# EAGLE board led_analog_watch_mvmt_v1_3 (EAGLE 6.2)
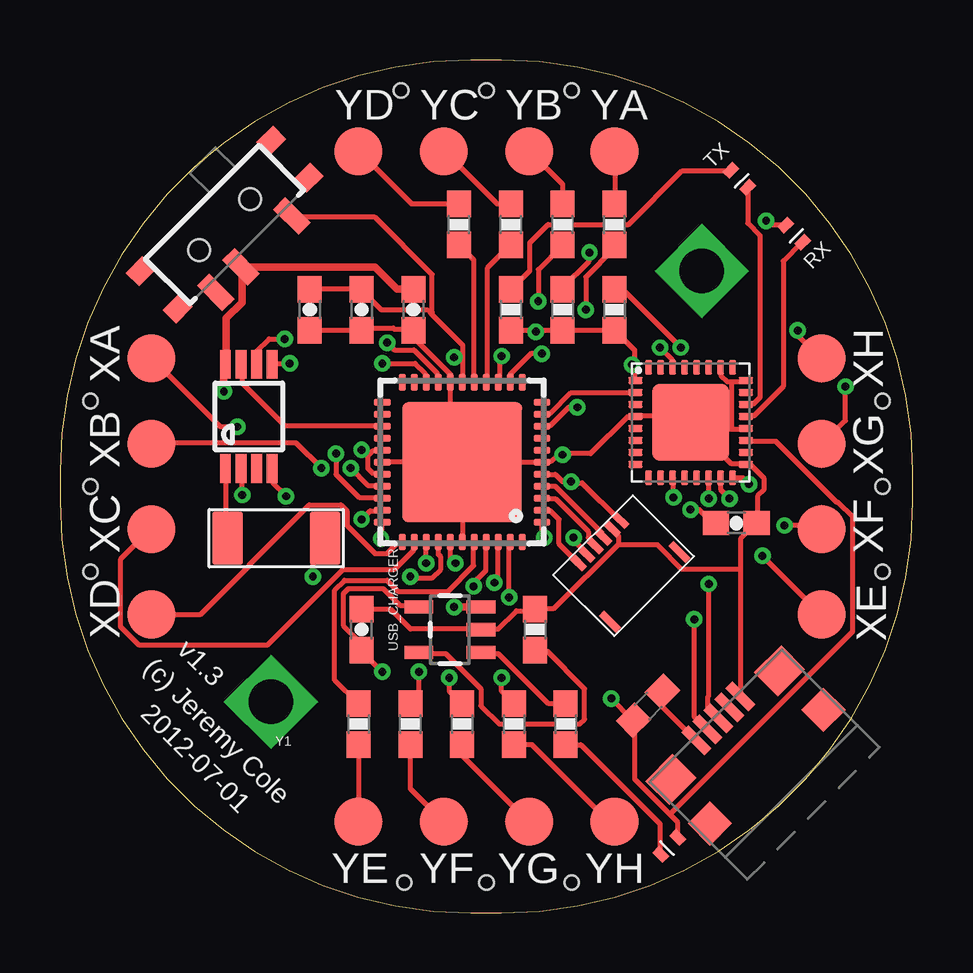
[diagram p0: board, top side]
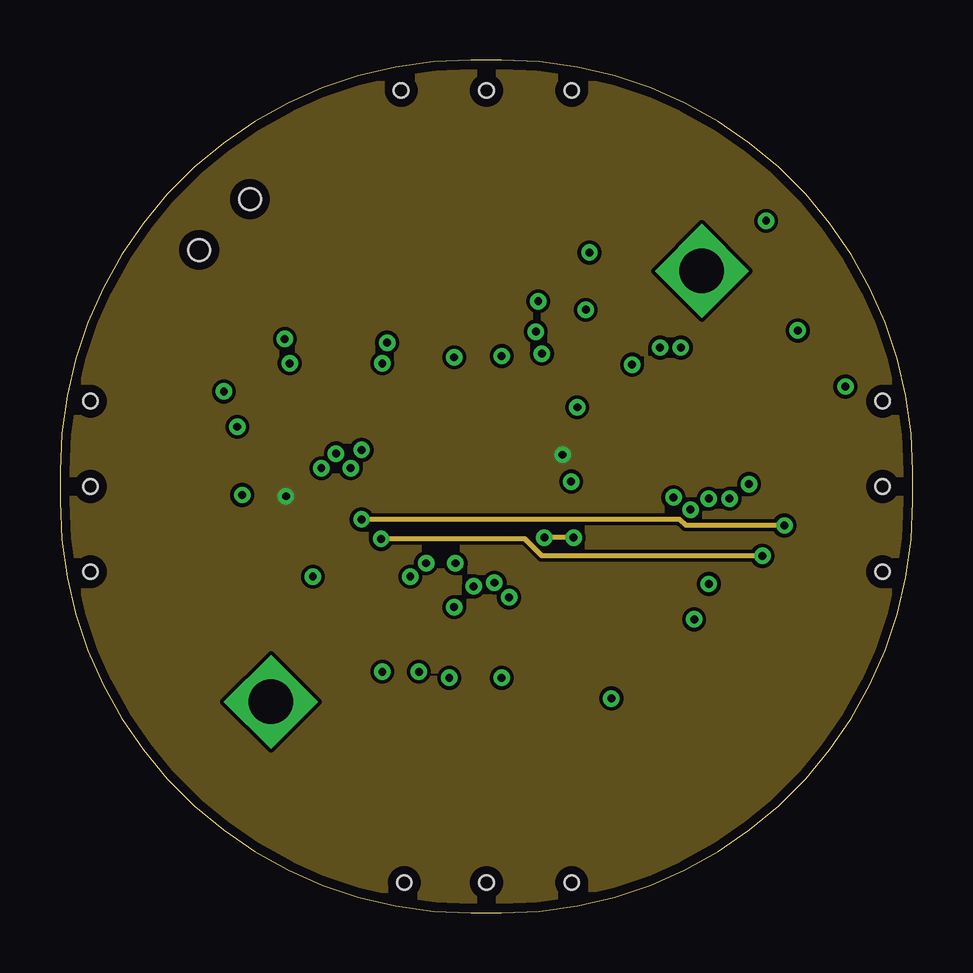
[diagram p1: board, inner layer GND]
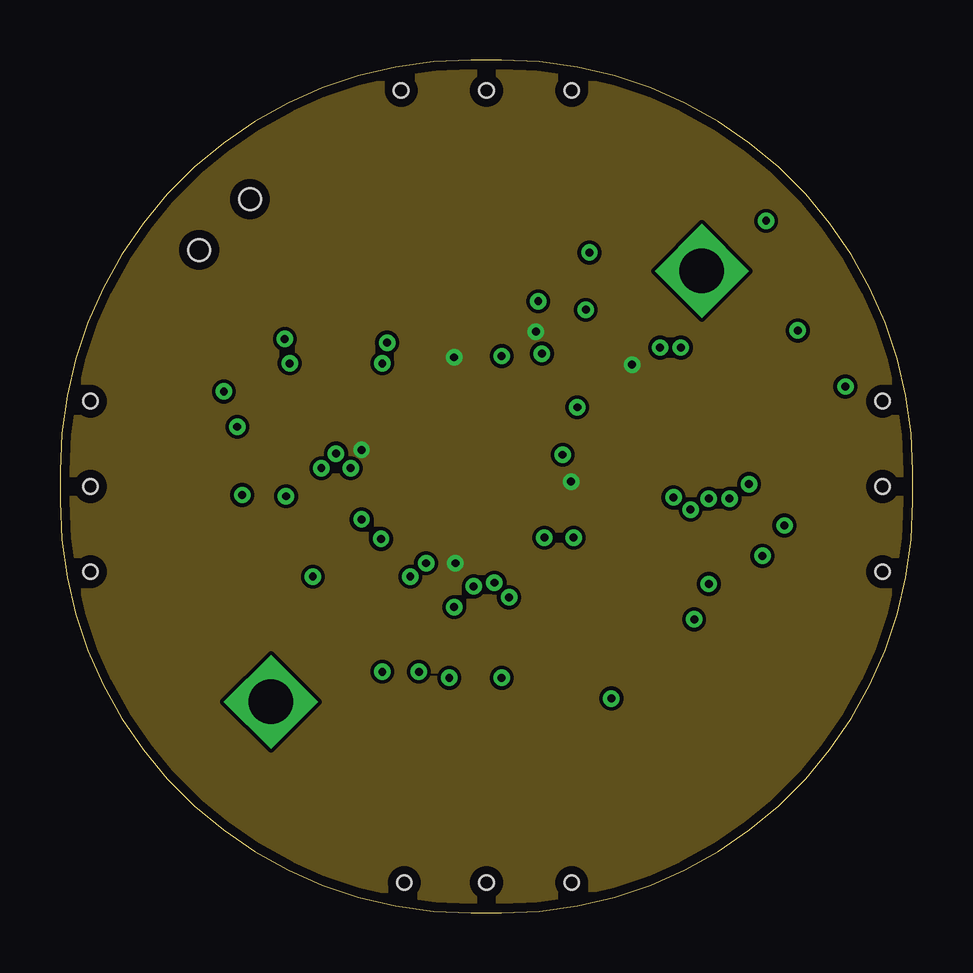
[diagram p2: board, inner layer VCC]
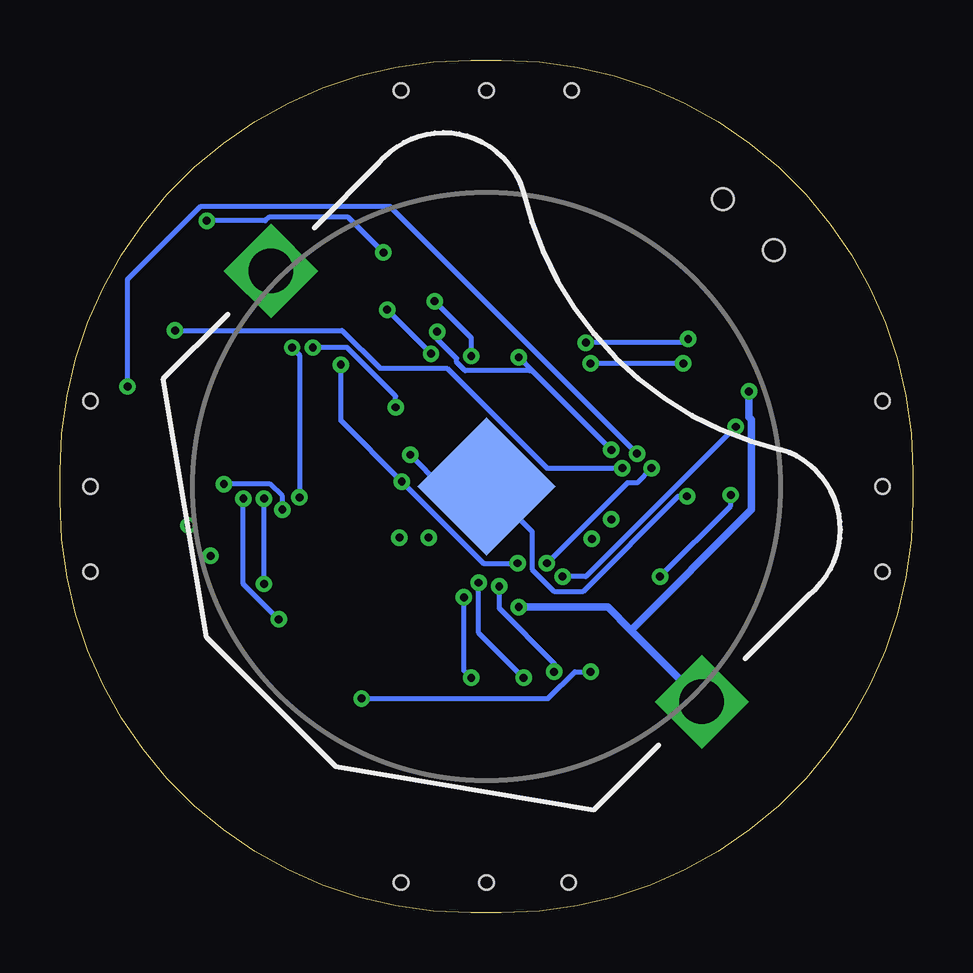
[diagram p3: board, bottom side, seen from below]

Size 35.56 x 35.56 mm. Coordinates in mm from the lower left corner, seen from the top.
Outline: 18.42,0 arc90 35.56,17.14 35.56,18.41 arc90 18.42,35.56 17.14,35.56 arc90 0,18.41 0,17.14 arc90 17.14,0 18.42,0
Copper layers (1*2+15*16): Top 0.0356mm / dielectric 1.5011mm / GND 0.0356mm / dielectric 0.1499mm / VCC 0.0356mm / dielectric 0.2007mm / Bottom 0.0356mm
Design rules: minimum track width 6mil, minimum drill 13mil, track to track 6mil, track to pad 6mil, pad to pad 6mil, via to via 6mil, smd to smd 6mil, copper to edge 15mil, drill to drill 6mil, minimum pad ring 7mil, minimum via ring 7mil, stop-mask expansion 4mil, vias tented up to drill 25mil, thermal gap 10mil
Net classes: 0 signal: width 0.203 mm; 1 supply: width 0.305 mm
Holes 0.6 mm at 17.78,1.27 34.29,17.78 1.27,17.78 17.78,34.29 34.29,14.22 34.29,21.34 21.34,1.27 14.35,1.27 1.27,14.22 1.27,21.34 14.22,34.29 21.34,34.29
tKeepout: area 1.3,11.2 to 2.7,24.1; area 33,11.3 to 34.4,24.3; area 11.3,33 to 24.3,34.4; area 11.3,1.1 to 24.3,2.5
tRestrict: area 3.6,25.8 to 9.9,32
vRestrict: area 7.7,14.5 to 10.3,16.8

## Footprints (pad centres in the part's own frame; a part is rotated, then mirrored left to right if it is on the bottom)
BATTCON_245MM_PTH = drill 1.854 square: 1 -12.7,0; 3 12.7,0 | smd 4.064 x 4.064: 2 0,0
0603-CAP = smd 1.1 x 1: 1 -0.85,0; 2 0.85,0
0402 = smd 0.6 x 0.4: 1 0,-0.5; 2 0,0.5
0603 = smd 1.1 x 1: 1 -0.85,0; 2 0.85,0
MLF44-TH = smd 0.7 x 0.3: 1 -3.325,2.5; 2 -3.325,2; 3 -3.325,1.5; 4 -3.325,1; 5 -3.325,0.5; 6 -3.325,0; 7 -3.325,-0.5; 8 -3.325,-1; 9 -3.325,-1.5; 10 -3.325,-2; 11 -3.325,-2.5; 23 3.325,-2.5; 24 3.325,-2; 25 3.325,-1.5; 26 3.325,-1; 27 3.325,-0.5; 28 3.325,0; 29 3.325,0.5; 30 3.325,1; 31 3.325,1.5; 32 3.325,2; 33 3.325,2.5 | smd 0.3 x 0.7: 12 -2.5,-3.325; 13 -2,-3.325; 14 -1.5,-3.325; 15 -1,-3.325; 16 -0.5,-3.325; 17 0,-3.325; 18 0.5,-3.325; 19 1,-3.325; 20 1.5,-3.325; 21 2,-3.325; 22 2.5,-3.325; 34 2.5,3.325; 35 2,3.325; 36 1.5,3.325; 37 1,3.325; 38 0.5,3.325; 39 0,3.325; 40 -0.5,3.325; 41 -1,3.325; 42 -1.5,3.325; 43 -2,3.325; 44 -2.5,3.325 | smd 5 x 5: TH 0,0
UMAX8 = smd 0.45 x 1.2: 1 -0.975,-2.175; 2 -0.325,-2.175; 3 0.325,-2.175; 4 0.975,-2.175; 5 0.975,2.175; 6 0.325,2.175; 7 -0.325,2.175; 8 -0.975,2.175
SWITCH-MA12R = smd 0.711 x 1.499: 1 -2.261,-1.74; 2 -0.762,-1.74; 3 2.235,-1.74 | smd 0.991 x 0.787: 4 3.848,-1.092; 5 -3.848,-1.092; 6 -3.848,1.092; 7 3.848,1.092 | hole 0.9: -1.499,0; 1.499,0
MOLEX_503480 = smd 0.3 x 0.7: 1 -1.25,1.4; 2 -0.75,1.4; 3 -0.25,1.4; 4 0.25,1.4; 5 0.75,1.4; 6 1.25,1.4 | smd 0.3 x 1: F1 -2.05,-1.25; F2 2.05,-1.25
SOT23-5 = smd 0.55 x 1.2: 1 -0.95,-1.3; 2 0,-1.3; 3 0.95,-1.3; 4 0.95,1.3; 5 -0.95,1.3
QFN32 = smd 0.6 x 0.3: 1 -2.3,1.75; 2 -2.3,1.25; 3 -2.3,0.75; 4 -2.3,0.25; 5 -2.3,-0.25; 6 -2.3,-0.75; 7 -2.3,-1.25; 8 -2.3,-1.75; 17 2.3,-1.75; 18 2.3,-1.25; 19 2.3,-0.75; 20 2.3,-0.25; 21 2.3,0.25; 22 2.3,0.75; 23 2.3,1.25; 24 2.3,1.75 | smd 0.3 x 0.6: 9 -1.75,-2.3; 10 -1.25,-2.3; 11 -0.75,-2.3; 12 -0.25,-2.3; 13 0.25,-2.3; 14 0.75,-2.3; 15 1.25,-2.3; 16 1.75,-2.3; 25 1.75,2.3; 26 1.25,2.3; 27 0.75,2.3; 28 0.25,2.3; 29 -0.25,2.3; 30 -0.75,2.3; 31 -1.25,2.3; 32 -1.75,2.3 | smd 3.2 x 3.2: EXP 0,0
TP20R = smd 2 x 2: TP 0,0
CRYSTAL-ABS10-SMD = smd 1.27 x 2.21: X1 -2.032,0; X2 2.032,0
USB_MICRO_B_TYCO = smd 0.4 x 1.35: 1 -1.3,2.85; 2 -0.65,2.85; 3 0,2.85; 4 0.65,2.85; 5 1.3,2.85 | smd 1.3 x 1.3: SH@1 3.35,0; SH@2 -3.35,0 | smd 1.6 x 1.4: SH@3 3.2,2.45; SH@4 -3.2,2.45

## Placement (x,y rotation side)
BAT1  3V Li-Ion  [BATTCON_245MM_PTH]  17.78,17.78 315 bottom
C1  0.1uF  [0603-CAP]  14.73,25.15 270 top
C2  0.1uF  [0603-CAP]  12.57,11.81 90 top
C3  0.1uF  [0603-CAP]  10.41,25.15 270 top
C4  0.1uF  [0603-CAP]  12.57,25.15 270 top
C5  0.1uF  [0603-CAP]  28.19,16.26 0 top
CHLED  [0402]  25.4,2.79 135 top
F1  500mA  [0603]  24.51,8.64 225 top
MCU  ATMEGA644M  [MLF44-TH]  16.76,18.8 180 top
R1  330  [0603]  21.08,7.87 90 top
R2  [0603]  18.92,7.87 270 top
R3  [0603]  16.76,7.87 270 top
R4  [0603]  14.6,7.87 270 top
R5  [0603]  12.45,7.87 270 top
R6  [0603]  16.64,28.7 90 top
R7  [0603]  18.8,28.7 90 top
R8  [0603]  20.96,28.7 90 top
R9  [0603]  23.11,28.7 90 top
R10  10k  [0603]  19.81,11.81 90 top
R11  330  [0603]  18.8,25.15 270 top
R12  330  [0603]  20.96,25.15 270 top
R13  10k  [0603]  23.11,25.15 270 top
RTC  DS1337UMAX  [UMAX8]  7.87,20.7 0 top
RXLED  [0402]  30.61,28.32 225 top
S1  [SWITCH-MA12R]  6.86,28.7 45 top
TXLED  [0402]  28.32,30.61 225 top
U$2  MOLEX_503480  [MOLEX_503480]  23.5,14.48 45 top
USB_CHARGER  MCP73831  [SOT23-5]  16.26,11.81 90 top
USB_SERIAL  FT232RQ  [QFN32]  26.29,20.45 0 top
XA  [TP20R]  3.81,23.11 0 top
XB  [TP20R]  3.81,19.56 0 top
XC  [TP20R]  3.81,16 0 top
XD  [TP20R]  3.81,12.45 0 top
XE  [TP20R]  31.75,12.45 0 top
XF  [TP20R]  31.75,16 0 top
XG  [TP20R]  31.75,19.56 0 top
XH  [TP20R]  31.75,23.11 0 top
Y1  32kHz  [CRYSTAL-ABS10-SMD]  9.02,15.62 180 top
YA  [TP20R]  23.11,31.75 270 top
YB  [TP20R]  19.56,31.75 270 top
YC  [TP20R]  16,31.75 270 top
YD  [TP20R]  12.45,31.75 270 top
YE  [TP20R]  12.45,3.81 270 top
YF  [TP20R]  16,3.81 270 top
YG  [TP20R]  19.56,3.81 270 top
YH  [TP20R]  23.11,3.81 270 top
µUSB  USB_MICROB_PLUG  [USB_MICRO_B_TYCO]  29.46,6.1 45 top

## Library data of the parts
BAT1 C1-C5 CHLED R1-R13 RTC RXLED S1 TXLED U$2 Y1 µUSB = jcole
F1 USB_CHARGER = SparkFun
MCU = atmel; MPN: ATMEGA644P-20MU; OC_FARNELL: 1748528; OC_NEWARK: 26R5636
USB_SERIAL = jcole; MPN: FT232RQ; OC_FARNELL: 1146033; OC_NEWARK: 91K9919
XA XB XC XD XE XF XG XH YA YB YC YD YE YF YG YH = testpad

## Nets
+B: BAT1.1
GND: BAT1.2 C1.2 C2.2 C3.2 C4.2 C5.2 MCU.6 MCU.18 MCU.28 MCU.39 MCU.TH R10.2 RTC.4 U$2.5 USB_CHARGER.2 USB_SERIAL.4 USB_SERIAL.17 USB_SERIAL.20 USB_SERIAL.24 USB_SERIAL.26 USB_SERIAL.EXP µUSB.5
MISO: MCU.2 U$2.1
MOSI: MCU.1 U$2.2
N$1: R1.2 USB_CHARGER.1
N$2: R10.1 USB_CHARGER.5
N$3: R2.2 YH.TP
N$4: R3.2 YG.TP
N$5: R4.2 YF.TP
N$6: R5.2 YE.TP
N$7: R6.2 YD.TP
N$8: R7.2 YC.TP
N$9: R8.2 YB.TP
N$10: R9.2 YA.TP
N$11: CHLED.2 R1.1
N$12: R13.1 USB_SERIAL.11
N$13: R12.1 RXLED.1
N$14: RTC.2 Y1.X1
N$15: RTC.1 Y1.X2
N$16: R11.1 TXLED.1
N$18: C5.1 USB_SERIAL.16
RST: MCU.4 U$2.4
RXD: MCU.9 USB_SERIAL.30
RXLED: RXLED.2 USB_SERIAL.21
SCK: MCU.3 U$2.3
SCL: MCU.19 RTC.6
SDA: MCU.20 RTC.5
SQW: MCU.25 RTC.7
TXD: MCU.10 USB_SERIAL.2
TXLED: TXLED.2 USB_SERIAL.22
USB_5V: C2.1 CHLED.1 F1.2 USB_CHARGER.4 USB_SERIAL.19
USB_N: USB_SERIAL.15 µUSB.2
USB_P: USB_SERIAL.14 µUSB.3
USB_UF: F1.1 µUSB.1
VBATT [supply]: BAT1.3 C1.1 RTC.8 S1.2 USB_CHARGER.3
VCC: C3.1 C4.1 MCU.5 MCU.17 MCU.27 MCU.29 MCU.38 R11.2 R12.2 R13.2 S1.3 U$2.6 USB_SERIAL.1
XA: MCU.37 XA.TP
XB: MCU.36 XB.TP
XC: MCU.35 XC.TP
XD: MCU.34 XD.TP
XE: MCU.33 XE.TP
XF: MCU.32 XF.TP
XG: MCU.31 XG.TP
XH: MCU.30 XH.TP
YA: MCU.13 R9.1
YB: MCU.14 R8.1
YC: MCU.15 R7.1
YD: MCU.16 R6.1
YE: MCU.40 R5.1
YF: MCU.41 R4.1
YG: MCU.42 R3.1
YH: MCU.43 R2.1

## Tracks (layer width: path | path; a pad name or v marks a point on that pad's centre or on a via)
GND  (via drill 0.33)
  Top 0.203: v9.42,17.37 8.87,17.93 8.87,18.49 RTC.4 | C3.2 10.44,24.28 12.57,24.28 C4.2 12.62,24.38 13.89,24.38 13.94,24.33 14.71,24.33 C1.2 14.81,24.23 14.81,23.93 16.28,22.45 16.28,22.25 MCU.18 | 16.28,22.15 MCU.18 | MCU.28 MCU.TH | 16.79,15.49 MCU.39 16.79,15.6 16.79,18.8 MCU.TH | MCU.18 16.28,22.05 16.28,18.85 MCU.TH | MCU.TH MCU.6 20.14,18.85 20.5,18.85 20.75,19.1 v20.96,19.1 21.01,19.15 22.12,19.15 23.65,20.68 23.9,20.68 USB_SERIAL.4 | 23.29,15.39 23.29,15.7 23.04,15.95 U$2.5 | 23.29,15.39 20.6,12.7 19.84,12.7 R10.2 19.74,12.6 19.03,12.6 18.26,11.84 17.65,11.84 USB_CHARGER.2 17.55,11.84 14.6,11.84 13.79,12.65 12.57,12.65 C2.2 | 28.02,22.15 27.81,22.15 27.56,22.4 27.56,22.71 USB_SERIAL.26 | 28.02,22.15 28.58,22.15 USB_SERIAL.24 | 24,20.73 USB_SERIAL.4 | 28.63,18.69 USB_SERIAL.17 | USB_SERIAL.17 28.52,18.75 27.96,18.75 26.29,20.42 USB_SERIAL.EXP | USB_SERIAL.4 24.11,20.73 26.04,20.73 26.24,20.52 USB_SERIAL.EXP | 28.02,20.17 26.64,20.17 USB_SERIAL.EXP | 28.02,20.17 28.58,20.17 USB_SERIAL.20 | USB_SERIAL.17 28.73,18.69 28.78,18.69 29.34,18.14 29.34,17.63 29.08,17.37 29.08,16.26 C5.2 28.98,16.2 28.37,15.6 28.37,14.33 | 28.02,20.17 28.02,22.15 | 28.37,14.33 28.37,9.04 µUSB.5 | 26.29,20.47 USB_SERIAL.EXP | 28.37,14.33 25.93,14.33 24.92,15.34 23.34,15.34 23.29,15.39
  Bottom 0.203: v9.42,17.37 9.78,17.37 13.74,13.41 14.96,13.41 15.87,14.33 15.87,15.9 17.76,17.78 BAT1.2 17.86,17.83 19.69,17.83 v20.96,19.1
  pour GND: -0.13,0 35.43,0 35.43,35.56 -0.13,35.56
MISO
  Top 0.203: MCU.2 20.09,16.76 20.45,16.76 20.8,16.41 20.8,15.39 U$2.1
MOSI  (via drill 0.33)
  Top 0.203: v20.19,15.65 20.09,15.75 20.09,16.26 MCU.1 | v21.41,15.65 21.41,15.54 21.97,14.99 U$2.2
  GND 0.203: v21.41,15.65 v20.19,15.65
N$1
  Top 0.203: R1.2 21.06,8.74 20.35,8.74 18.26,10.82 17.6,10.82 USB_CHARGER.1
N$2
  Top 0.203: R10.1 19.84,10.92 20.3,10.92 21.87,9.35 21.87,8.08 21.67,7.87 18.31,7.87 17.55,8.64 17.55,9.35 16.08,10.82 14.96,10.82 USB_CHARGER.5
N$3
  Top 0.203: YH.TP 22.89,3.81 19.69,7.01 R2.2
N$4
  Top 0.203: R3.2 16.79,7.01 16.79,6.55 19.53,3.81 YG.TP
N$5
  Top 0.203: R4.2 14.6,5.18 15.98,3.81 YF.TP
N$6
  Top 0.203: R5.2 12.47,7.01 12.47,3.81 YE.TP
N$7
  Top 0.203: R6.2 16.64,29.57 14.66,29.57 12.47,31.75 YD.TP
N$8
  Top 0.203: R7.2 18.77,29.57 18.21,29.57 16.03,31.75 YC.TP
N$9
  Top 0.203: R8.2 20.96,30.38 19.58,31.75 YB.TP
N$10
  Top 0.203: R9.2 23.14,29.57 23.14,31.75 YA.TP
N$11
  Top 0.203: CHLED.2 25.02,2.49 25.02,3.71 21.72,7.01 21.11,7.01 R1.1
N$12  (via drill 0.33)
  Top 0.203: v25.58,17.32 25.58,18.14 USB_SERIAL.11 | v25.88,23.57 23.5,25.96 23.14,25.96 R13.1
  Bottom 0.203: v25.58,17.32 25.58,23.27 v25.88,23.57
N$13  (via drill 0.33)
  Top 0.203: v29.44,28.85 29.59,28.7 30.25,28.7 RXLED.1 | v22.07,27.53 22.07,27.18 20.96,26.06 R12.1
  Bottom 0.203: v29.44,28.85 27,28.85 26.85,29.01 23.55,29.01 v22.07,27.53
N$14  (via drill 0.33)
  Top 0.203: v7.6,17.42 7.6,18.49 RTC.2 | v10.54,14.02 10.54,15.09 11.05,15.6 Y1.X1
  Bottom 0.203: v7.6,17.42 7.6,16.97 v10.54,14.02
N$15
  Top 0.203: RTC.1 6.93,18.49 6.93,15.7 6.99,15.65 Y1.X2
N$16
  Top 0.203: TXLED.1 27.96,30.94 25.93,30.94 23.7,28.7 20.35,28.7 19.58,27.94 19.58,26.77 18.82,26.01 R11.1
N$18  (via drill 0.33)
  Top 0.203: v28.73,17.88 28.47,18.14 28.07,18.14 USB_SERIAL.16 | v26.29,16.82 26.64,16.82 27.2,16.26 C5.1
  Bottom 0.203: v28.73,17.88 26.8,17.88 26.29,17.37 v26.29,16.82
RST
  Top 0.203: MCU.4 20.09,17.78 20.65,17.78 22.63,15.8 22.63,15.65 U$2.4
RXD  (via drill 0.33)
  Top 0.203: v25.02,23.57 25.53,23.06 25.53,22.76 USB_SERIAL.30 | v21.57,21.08 21.21,21.08 20.45,20.32 20.09,20.32 MCU.9
  Bottom 0.203: v25.02,23.57 23.6,23.57 21.57,21.54 v21.57,21.08
RXLED
  Top 0.203: USB_SERIAL.21 28.63,20.73 28.93,20.73 30.15,21.95 30.15,27.18 30.91,27.94 RXLED.2
SCK
  Top 0.203: U$2.3 22.33,15.34 22.02,15.65 22.02,15.9 20.65,17.27 20.09,17.27 MCU.3
SCL  (via drill 0.33)
  Top 0.203: v13.64,23.77 13.94,23.47 14.76,23.47 15.72,22.5 15.72,22.15 MCU.19 | v9.37,23.93 8.71,23.93 8.2,23.42 8.2,22.91 RTC.6
  Bottom 0.203: v13.64,23.77 9.52,23.77 v9.37,23.93
SDA  (via drill 0.33)
  Top 0.203: v13.44,22.91 14.81,22.91 15.21,22.5 15.21,22.15 MCU.20 | v9.58,22.91 8.87,22.91 RTC.5
  Bottom 0.203: v9.58,22.91 v13.44,22.91
SQW
  Top 0.203: MCU.25 13.44,20.32 9.37,20.32 7.6,22.1 7.6,22.86 RTC.7
TXD
  Top 0.203: USB_SERIAL.2 23.95,21.69 21.31,21.69 20.45,20.83 20.09,20.83 MCU.10
TXLED
  Top 0.203: USB_SERIAL.22 28.63,21.23 28.93,21.23 29.19,21.49 29.19,28.25 28.68,28.75 28.68,30.23 TXLED.2
USB_5V  (via drill 0.33)
  Top 0.203: USB_CHARGER.4 14.91,12.8 14.2,12.8 13.49,13.51 12.01,13.51 11.81,13.31 11.81,11.99 12.57,11.23 C2.1 12.62,10.87 v13.44,10.06 | 25.43,4.12 23.95,5.59 23.95,8.03 F1.2 23.85,8.08 v22.99,8.94 | 25.43,4.12 25.73,3.81 25.73,3.15 CHLED.1 | 25.43,4.12 33.04,11.73 33.04,16.51 32.44,17.12 32.38,17.12 29.85,19.66 28.63,19.66 USB_SERIAL.19
  Bottom 0.203: v13.44,10.06 14.1,10.06 15.21,8.94 v22.99,8.94
USB_N  (via drill 0.33)
  Top 0.203: v27.92,17.27 27.56,17.63 27.56,18.14 USB_SERIAL.15 | v26.44,12.24 26.44,8.18 26.95,7.67 µUSB.2
  Bottom 0.203: v27.92,17.27 27.92,13.72 v26.44,12.24
USB_P  (via drill 0.33)
  Top 0.203: v27.05,17.27 27.05,18.14 USB_SERIAL.14 | v27.05,13.72 27.05,9.04 27,8.99 27,8.53 27.41,8.13 µUSB.3
  Bottom 0.203: v27.05,13.72 v27.05,17.27
USB_UF
  Top 0.203: F1.1 25.12,9.2 25.12,8.59 26.49,7.21 µUSB.1
VBATT  (via drill 0.33)
  Top 0.305: C1.1 14.71,26.01 14.05,26.01 13.13,26.92 7.6,26.92 S1.2 7.6,26.77 7.6,25.45 6.93,24.79 6.93,22.91 RTC.8 6.83,22.76 v6.83,21.74 | v16.43,12.75 USB_CHARGER.3
  Bottom 0.305: v16.43,12.75 12.72,12.75 11.76,11.79 | 11.76,11.79 8.81,8.84 BAT1.3 | v6.83,21.74 6.83,20.68 6.73,20.57 6.73,16.82 11.76,11.79
VCC  (via drill 0.33)
  Top 0.203: 19.84,24.28 20.96,24.28 R12.2 21.01,24.28 23.04,24.28 R13.2 23.14,24.28 23.95,23.47 23.95,22.86 | 19.84,24.28 18.82,24.28 R11.2 | 23.95,22.86 23.95,22.2 USB_SERIAL.1 | 16.28,15.49 MCU.38 16.28,15.39 16.28,14.78 v16.48,14.58 | U$2.6 23.34,16.36 21.77,17.93 21.36,17.93 v21.31,17.98 20.96,17.98 20.65,18.29 20.09,18.29 MCU.5 | v23.85,22.86 23.95,22.86 | 12.83,19.05 12.83,18.54 13.03,18.34 13.44,18.34 MCU.29 | 12.83,19.05 13.03,19.25 13.44,19.25 MCU.27 | 16.79,22.15 MCU.17 16.79,22.25 16.79,23.16 | 16.79,23.16 16.79,23.67 15.47,24.99 | 15.47,24.99 15.32,25.15 13.39,25.15 12.57,25.96 C4.1 12.52,26.01 10.44,26.01 C3.1 | v12.57,19.3 12.83,19.05 | 16.79,23.16 v16.43,23.16 | S1.3 9.68,29.01 13.13,29.01 15.52,26.62 15.52,25.04 15.47,24.99 | v19.84,24.23 19.84,24.28
  Bottom 0.203: v16.48,14.58 17.91,14.58 v21.31,17.98 23.85,20.52 v23.85,22.86 | v16.43,23.16 15.93,22.66 | 15.93,22.66 v12.57,19.3 | v19.84,24.23 19.84,23.93 19.03,23.11 19.03,22.96 18.67,22.61 15.98,22.61 15.93,22.66
  pour VCC: -0.13,0 35.43,0 35.43,35.56 -0.13,35.56
XA  (via drill 0.33)
  Top 0.203: v14.6,14.02 14.66,13.97 15.52,13.97 15.87,14.33 15.87,14.83 15.77,14.94 15.77,15.44 MCU.37 | v7.39,20.27 6.68,20.27 3.83,23.11 XA.TP
  Bottom 0.203: v14.6,14.02 13.64,14.02 v7.39,20.27
XB  (via drill 0.33)
  Top 0.203: v15.26,14.58 15.26,15.44 MCU.36 | v10.9,18.54 9.83,19.61 3.89,19.61 3.83,19.56 XB.TP
  Bottom 0.203: v15.26,14.58 11.91,17.93 11.51,17.93 v10.9,18.54
XC
  Top 0.203: MCU.35 14.76,15.44 14.76,15.14 13.94,14.33 11.81,14.33 8.66,11.18 3.28,11.18 2.51,11.94 2.51,14.73 3.79,16 XC.TP
XD
  Top 0.203: XD.TP 5.87,12.45 7.9,14.48 7.9,14.53 10.39,17.02 11.71,17.02 11.96,16.76 11.96,16.15 13.13,14.99 13.64,14.99 14.1,15.44 14.25,15.44 MCU.34
XE  (via drill 0.33)
  Top 0.203: v13.39,15.6 13.44,15.65 13.44,16.26 MCU.33 | v29.29,14.88 31.73,12.45 XE.TP
  GND 0.203: v13.39,15.6 19.38,15.6 20.09,14.88 v29.29,14.88
XF  (via drill 0.33)
  Top 0.203: v12.57,16.41 12.93,16.76 13.44,16.76 MCU.32 | v30.2,16.15 31.57,16.15 31.73,16 XF.TP
  GND 0.203: v12.57,16.41 25.83,16.41 26.09,16.15 v30.2,16.15
XG  (via drill 0.33)
  Top 0.203: v11.51,19.15 11.51,18.29 12.47,17.32 13.44,17.32 MCU.31 | v32.74,21.95 32.74,20.52 31.78,19.56 XG.TP
  Bottom 0.203: v11.51,19.15 21.82,29.46 29.69,29.46 32.74,26.42 v32.74,21.95
XH  (via drill 0.33)
  Top 0.203: v12.12,18.54 12.83,17.83 13.44,17.83 MCU.30 | v30.76,24.28 30.76,24.08 31.73,23.11 XH.TP
  Bottom 0.203: v12.12,18.54 15.26,18.54 19.43,22.71 22.23,22.71 23.8,24.28 v30.76,24.28
YA  (via drill 0.33)
  Top 0.203: v20.09,23.32 19.63,23.32 18.77,22.45 18.77,22.15 MCU.13 | v21.92,25.15 21.92,26.52 23.09,27.69 23.09,27.84 R9.1
  Bottom 0.203: v21.92,25.15 v20.09,23.32
YB  (via drill 0.33)
  Top 0.203: v18.42,23.22 18.31,23.11 18.31,22.15 MCU.14 | v19.94,25.5 19.94,26.82 20.96,27.84 R8.1
  Bottom 0.203: v18.42,23.22 18.42,23.98 v19.94,25.5
YC
  Top 0.203: MCU.15 17.8,22.15 17.8,26.87 18.77,27.84 R7.1
YD
  Top 0.203: MCU.16 17.25,22.15 17.25,27.23 16.64,27.84 R6.1
YE
  Top 0.203: MCU.40 17.25,15.44 17.25,14.48 16.18,13.41 14.1,13.41 13.64,13.87 11.86,13.87 11.46,13.46 11.46,9.7 12.42,8.74 R5.1
YF  (via drill 0.33)
  Top 0.203: v17.25,13.61 17.25,13.77 17.76,14.28 17.76,15.44 MCU.41 | v14.96,10.06 14.96,9.09 14.6,8.74 R4.1
  Bottom 0.203: v17.25,13.61 17.25,12.7 14.96,10.41 v14.96,10.06
YG  (via drill 0.33)
  Top 0.203: v18.11,13.77 18.26,13.92 18.26,15.44 MCU.42 | v16.23,9.8 16.23,9.25 16.74,8.74 R3.1
  Bottom 0.203: v18.11,13.77 18.11,11.68 v16.23,9.8
YH  (via drill 0.33)
  Top 0.203: v18.72,13.16 18.72,15.44 MCU.43 | v18.42,9.8 18.42,9.25 18.92,8.74 R2.1
  Bottom 0.203: v18.72,13.16 18.72,10.11 v18.42,9.8

## Text on the board
tNames: TX | RX | v1.3 | (c) Jeremy Cole | 2012-07-01